# Altium PCB altium.pcbdoc
Units mil, origin at the board's own origin, x right, y up, seen from the top; angles counter-clockwise.
Board outline 2325 x 1809 mil, 2 copper layers (Top Layer, Bottom Layer); 4 components, 14 nets, 25 pads, 0 vias.
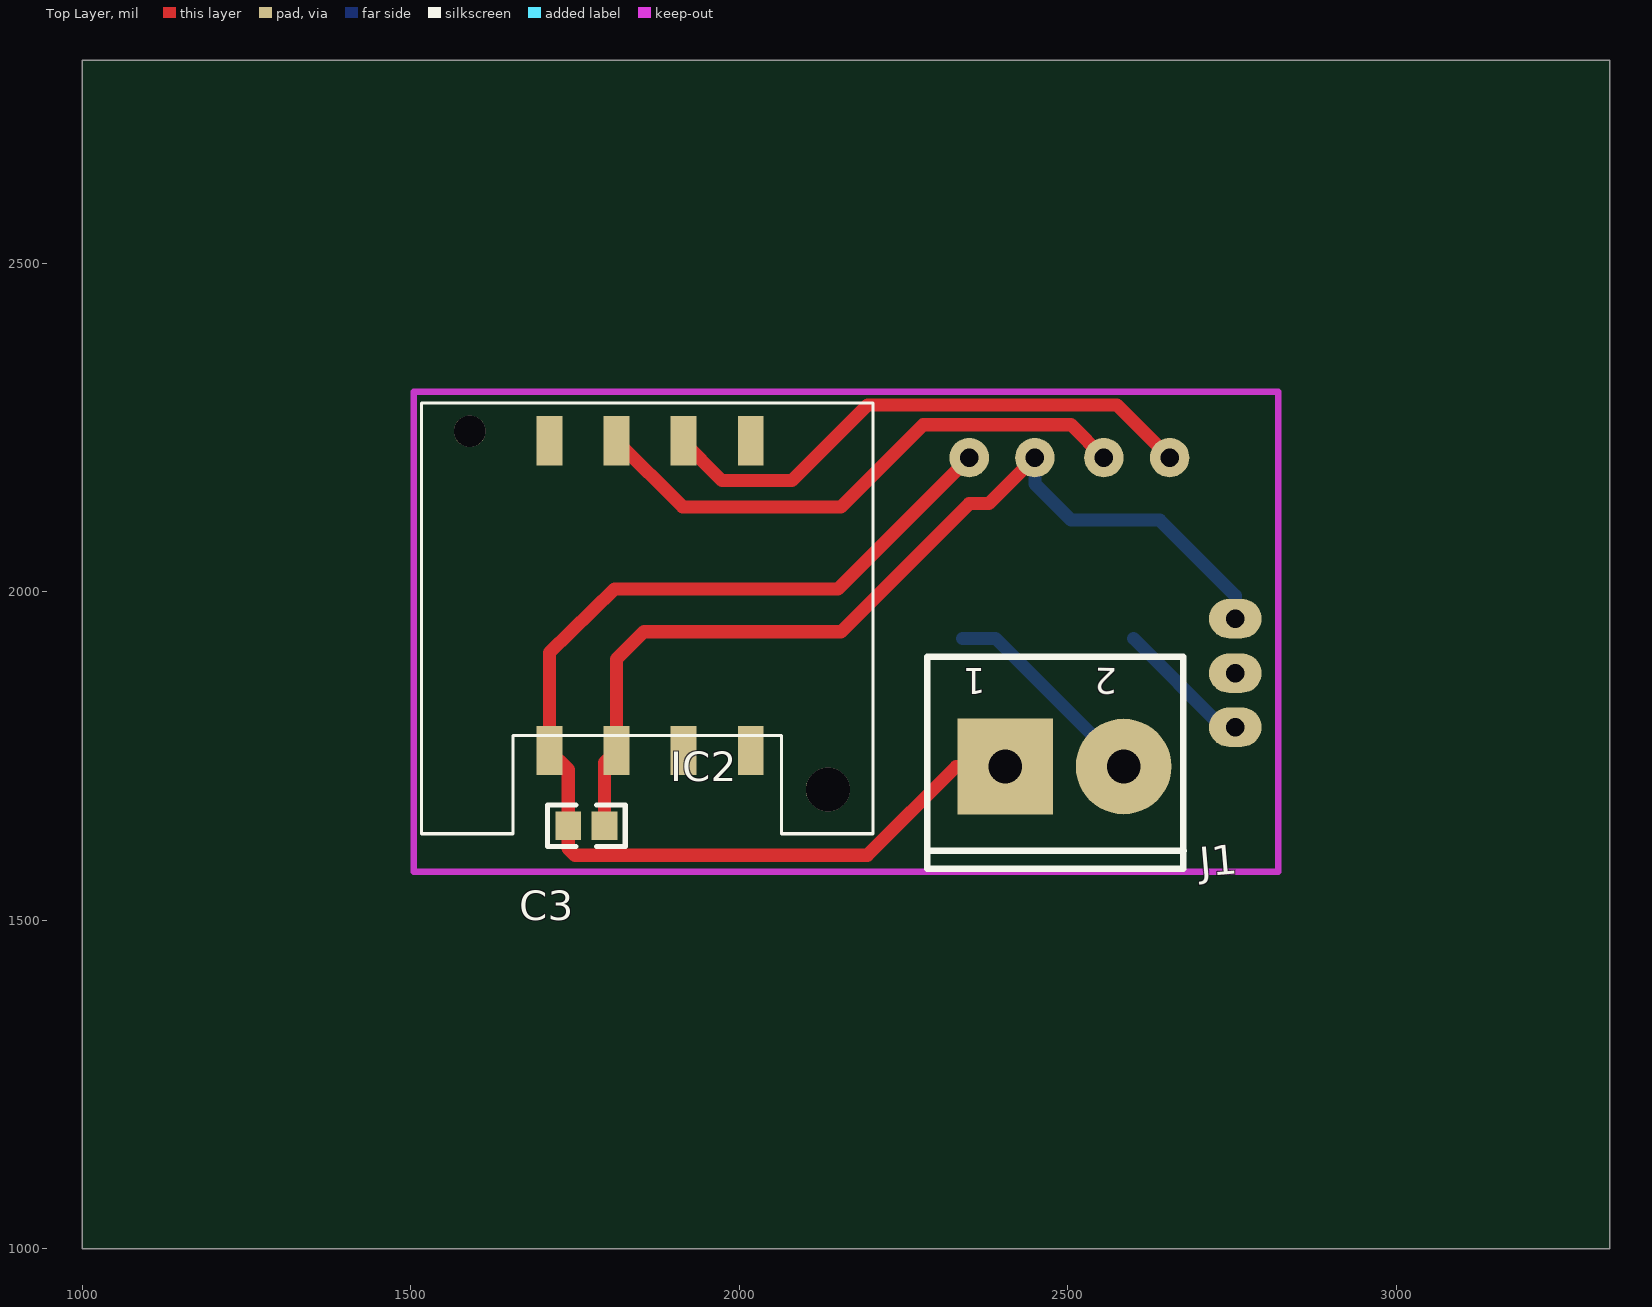
[diagram p0: Top Layer view]
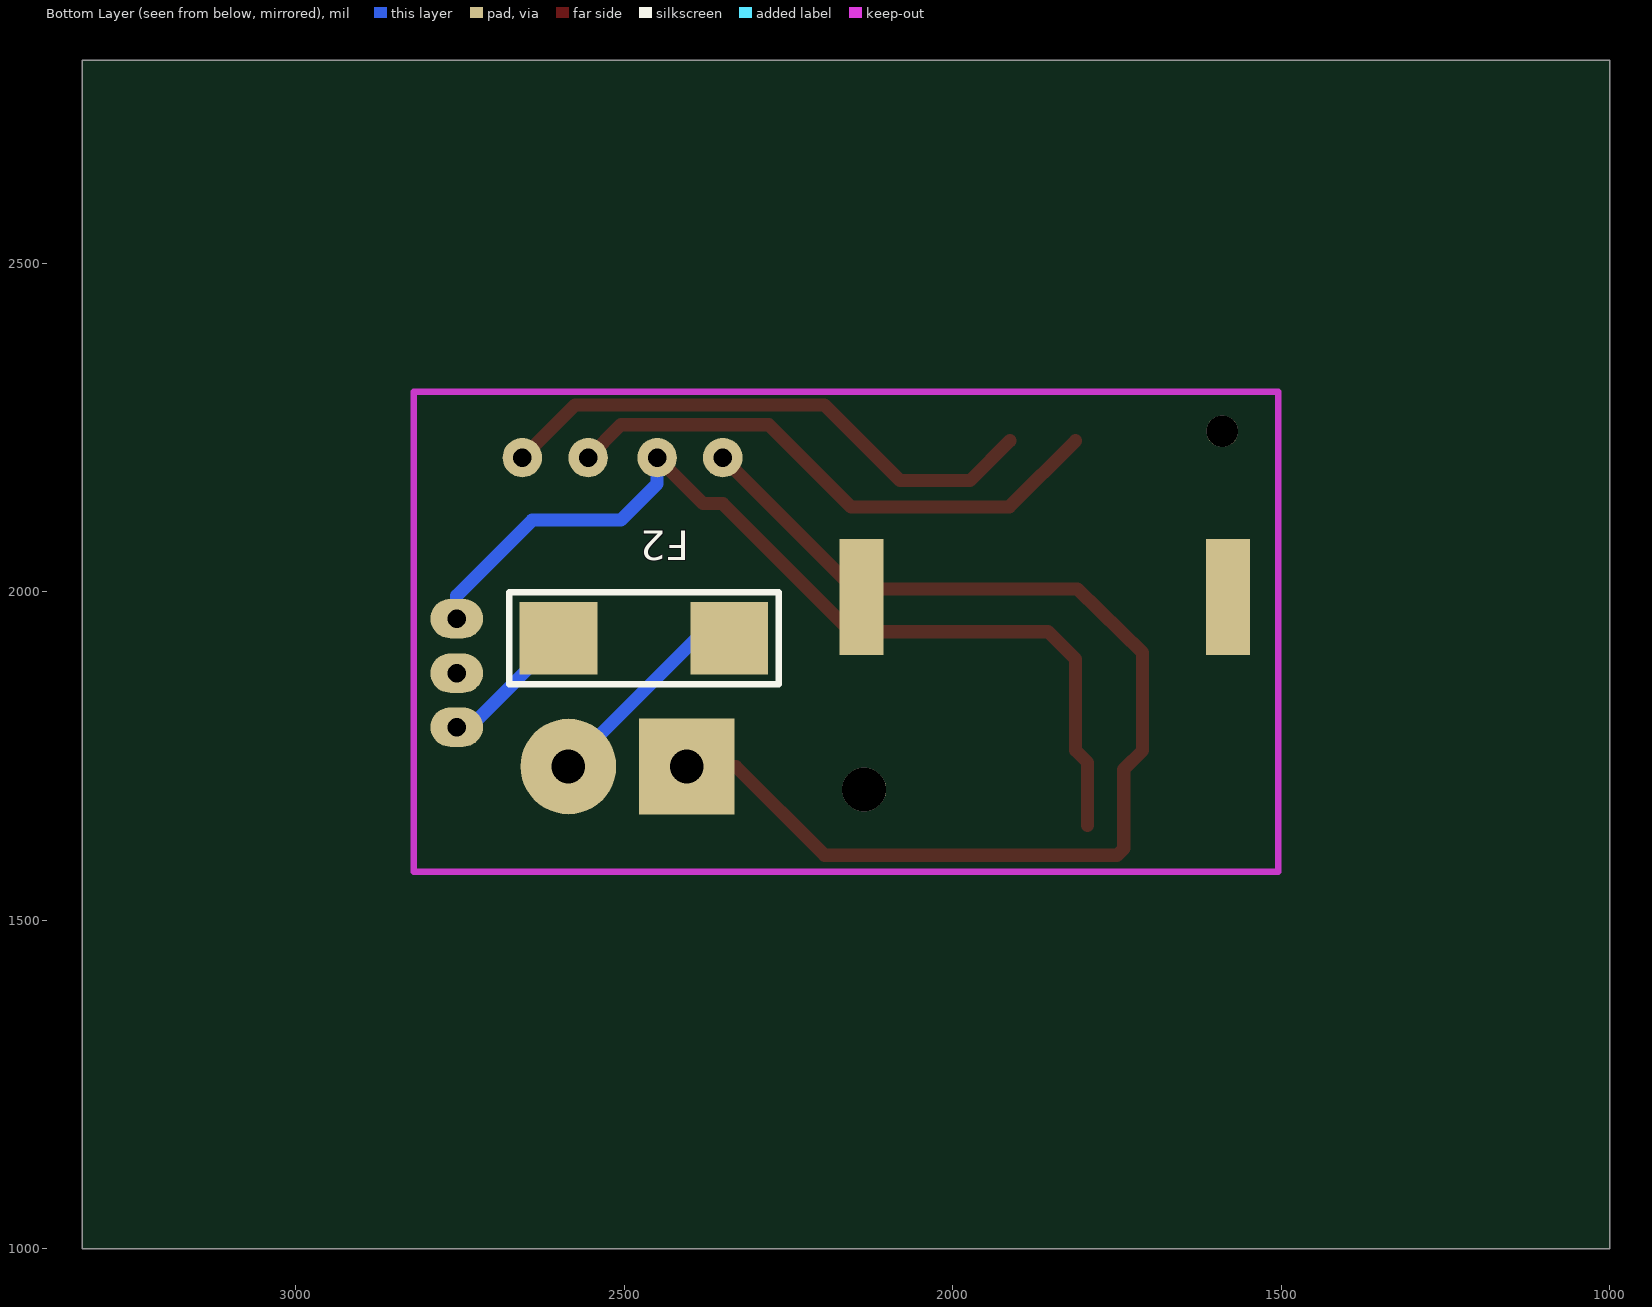
[diagram p1: Bottom Layer view, seen from below]

## Layer stack, top to bottom
Top Layer: signal copper (thickness not stored)
Dielectric: dielectric 12.6, FR-4, Dk 4.8
Bottom Layer: signal copper (thickness not stored)

## Board outline
3325,1000 1000,1000 1000,2809 3325,2809

## Components (designator, comment, footprint, x,y, rotation, side; value= is the part's Value field where it differs from the comment)
C3 "10nF" 0603 1767.44,1644 r0 top
F2 "NO" OMF_125 2440,1914 r0 bottom
IC2 "TR-72D" IQRF_KON-SIM-01 1860,2034 r180 top
J1 "KF127_2P_5.08" KF127_2P_5.08 2475,1724 r90 top

## Footprints (in the part's own frame and the unit in brackets; to place one, negate y for a bottom-side part, rotate by r counter-clockwise, add the part's x,y. Pads: shape width x height; smd on the part's side, far side on the other; paste and mask are expansions set on the pad)
0603 [mm]
  rect 1x1.1 smd: 1(-0.7,0) 2(0.7,0)
  silkscreen extent -1.5,-0.8 1.5,0.8
IQRF_KON-SIM-01 [mm]
  rect 1x1.9 smd: 1(-4.002,7.002) 2(-1.401,7.002) 3(1.19,7.002) 4(3.781,7.002) 5(-4.002,-4.969) 6(-1.401,-4.969) 7(1.19,-4.969) 8(3.781,-4.969)
  rect 1.7x4.5 smd far side: 9(-7.08,1.07) 9(7.079,1.07)
  silkscreen extent -8.72,-6.43 8.72,10.22
KF127_2P_5.08 [mil]
  rect 145.67x145.67 hole 51.18: 1(10,70)
  round 145.67 hole 51.18: 2(10,-110)
  silkscreen extent -146,-201 177,189
OMF_125 [mm]
  rect 3x2.8 smd: 1(4.064,-0.381) 2(-2.54,-0.381)
  silkscreen extent -4.44,-2.16 5.97,1.4

## Free pads (board coordinates)
  oval 80x60 hole 28: 3(2755,1794) 3(2755,1876) 3(2755,1959)
  round 60 hole 28: 4(2350,2204) 4(2450,2204) 4(2555,2204) 4(2655,2204)
  round 48 hole 48 unplated: ""(1590,2244)
  round 67 hole 67 unplated: ""(2135,1699)

## Nets (pads, with @x,y where several pads share a name; then routed paths per layer and width w, separated by ;. In a path a pad name is that pad's centre, name@x,y a point inside that pad or via, vN(x,y) a via of type N, cw(c..) or ccw(c..) an arc to the next point about the centre after c; other vN are vias at no path point)
0: pad.3@2755,1876
5V: F2.2 J1.2 | length 325.8
  Bottom Layer w20: F2.2 2390,1929 J1.2
5V-: F2.1 pad.3@2755,1794 | length 210.9
  Bottom Layer w20: F2.1 2735,1794 pad.3@2755,1794
+5V: C3.2 IC2.3 pad.3@2755,1959 pad.4@2450,2204 | length 1475.1
  Top Layer w20: C3.2 1795,1740.19 IC2.3 ; IC2.3 1813.1,1897.1 1855,1939 2155,1939 2350,2134 2380,2134 pad.4@2450,2204
  Bottom Layer w20: pad.4@2450,2204 2450,2164 2505,2109 2640,2109 2755,1994 pad.3@2755,1959
C1/BTN1/LEFT: IC2.1
C2/BTN2/RIGHT: IC2.2
C8/CLK: IC2.8
GND: C3.1 IC2.4 J1.1 pad.4@2350,2204 | length 1796.5
  Top Layer w20: C3.1@1740,1644 C3.1 ; pad.4@2350,2204 2150,2004 1810,2004 1711.14,1907.14 IC2.4 1739.88,1729.59 C3.1 ; J1.1 2330,1734 2195,1599 1750,1599 1739.88,1609.12 C3.1
R2_1: IC2.5
S$22: 
S$67: 
S$69: 
SCL: IC2.6 pad.4@2655,2204 | length 847.7
  Top Layer w20: IC2.6@1913.14,2229.63 1973.77,2169 2080,2169 2195,2284 2575,2284 pad.4@2655,2204
SDA: IC2.7 pad.4@2555,2204 | length 856
  Top Layer w20: IC2.7 1913.77,2129 2155,2129 2280,2254 2505,2254 pad.4@2555,2204
pads on no net: IC2.9

## Text inside footprints (layer, text, board x,y; h text height)
J1: Top Overlay "1" at 2375,1883.68 h39.37 r180; Top Overlay "2" at 2575.34,1883.68 h39.37 r179